# Altium PCB MainBoardSTM32.PcbDoc
Units mil, origin at the board's own origin, x right, y up, seen from the top; angles counter-clockwise.
Board outline 7675 x 6350 mil, 2 copper layers (Top Layer, Bottom Layer); 30 components, 43 nets, 161 pads, 14 vias.
Unrouted connection lines stored in the file: 50.
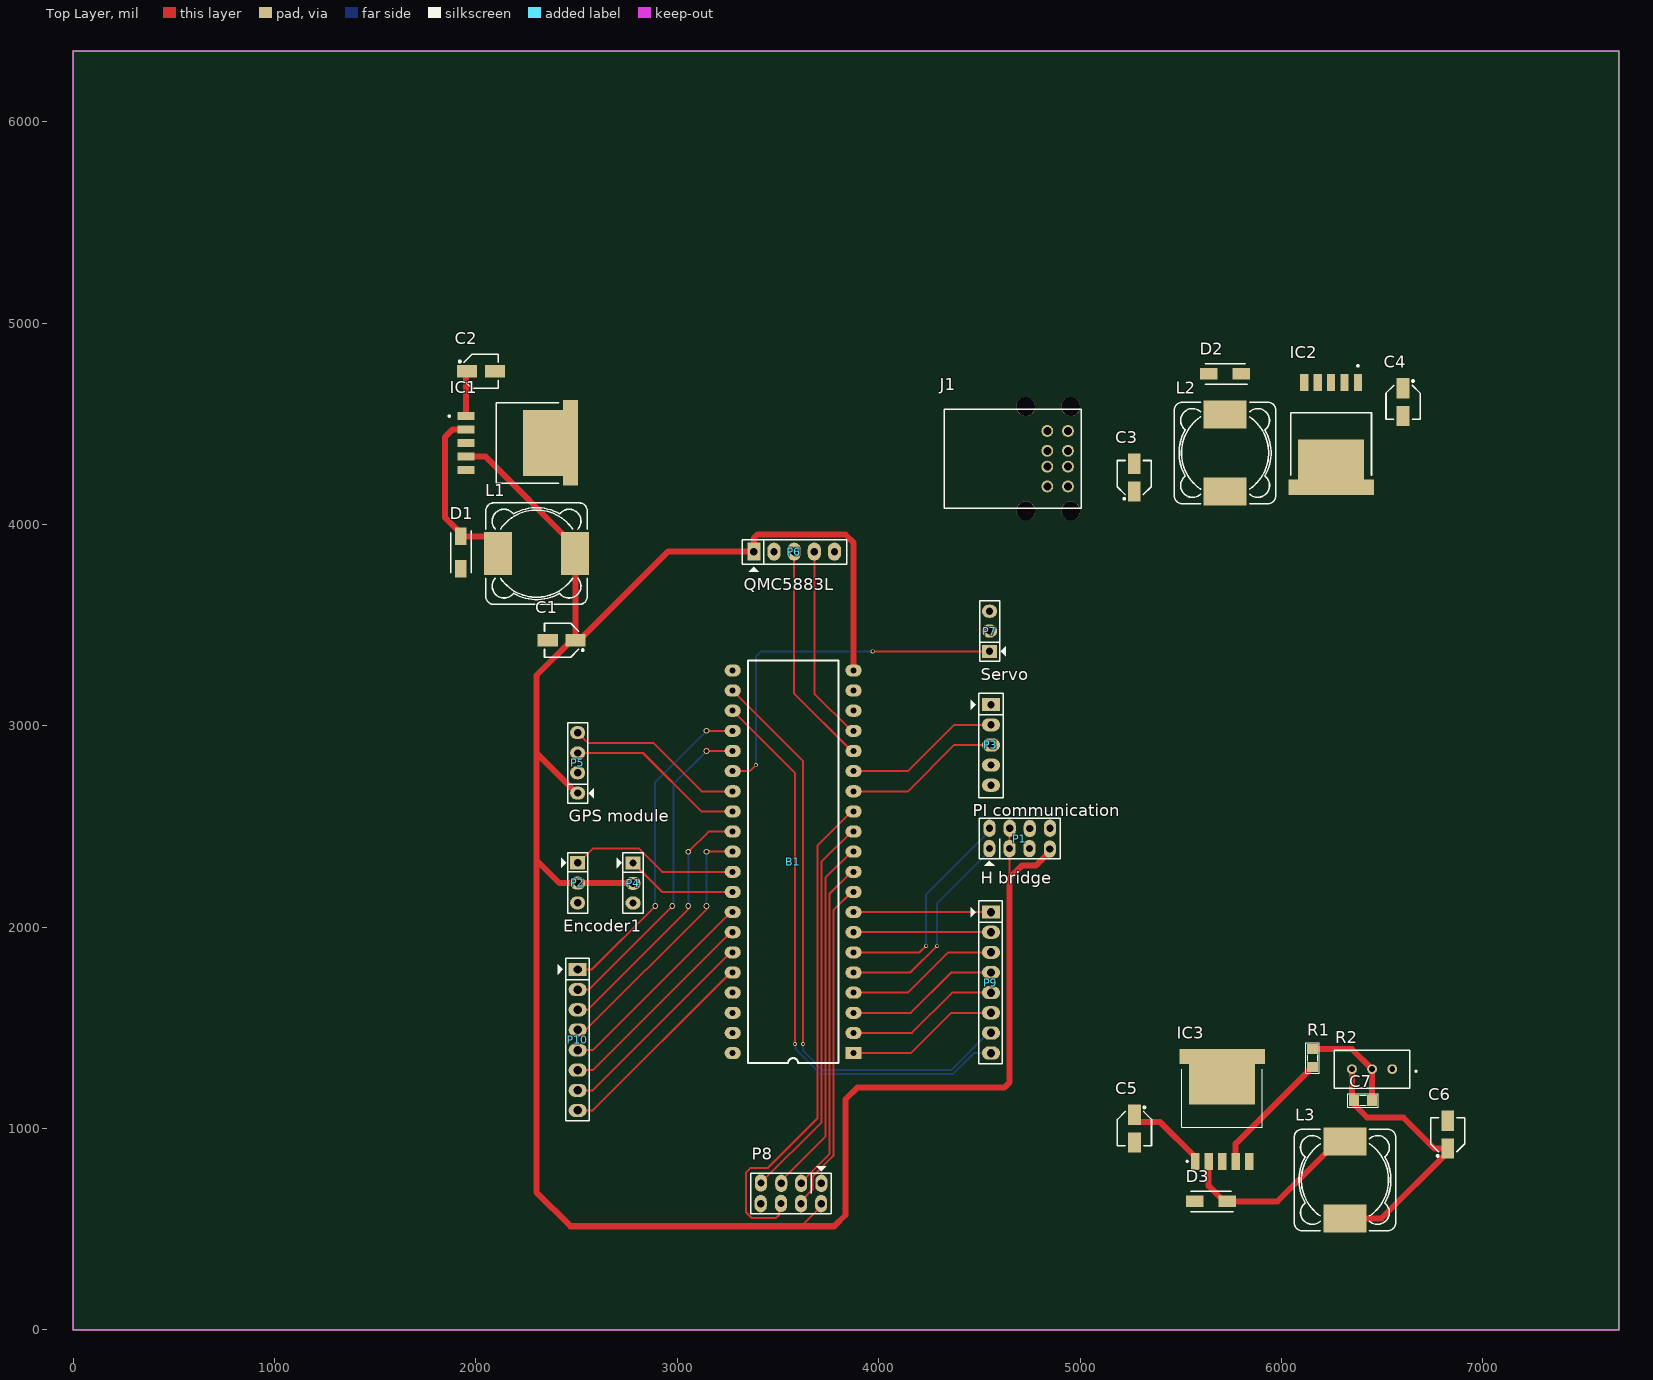
[diagram p0: Top Layer view]
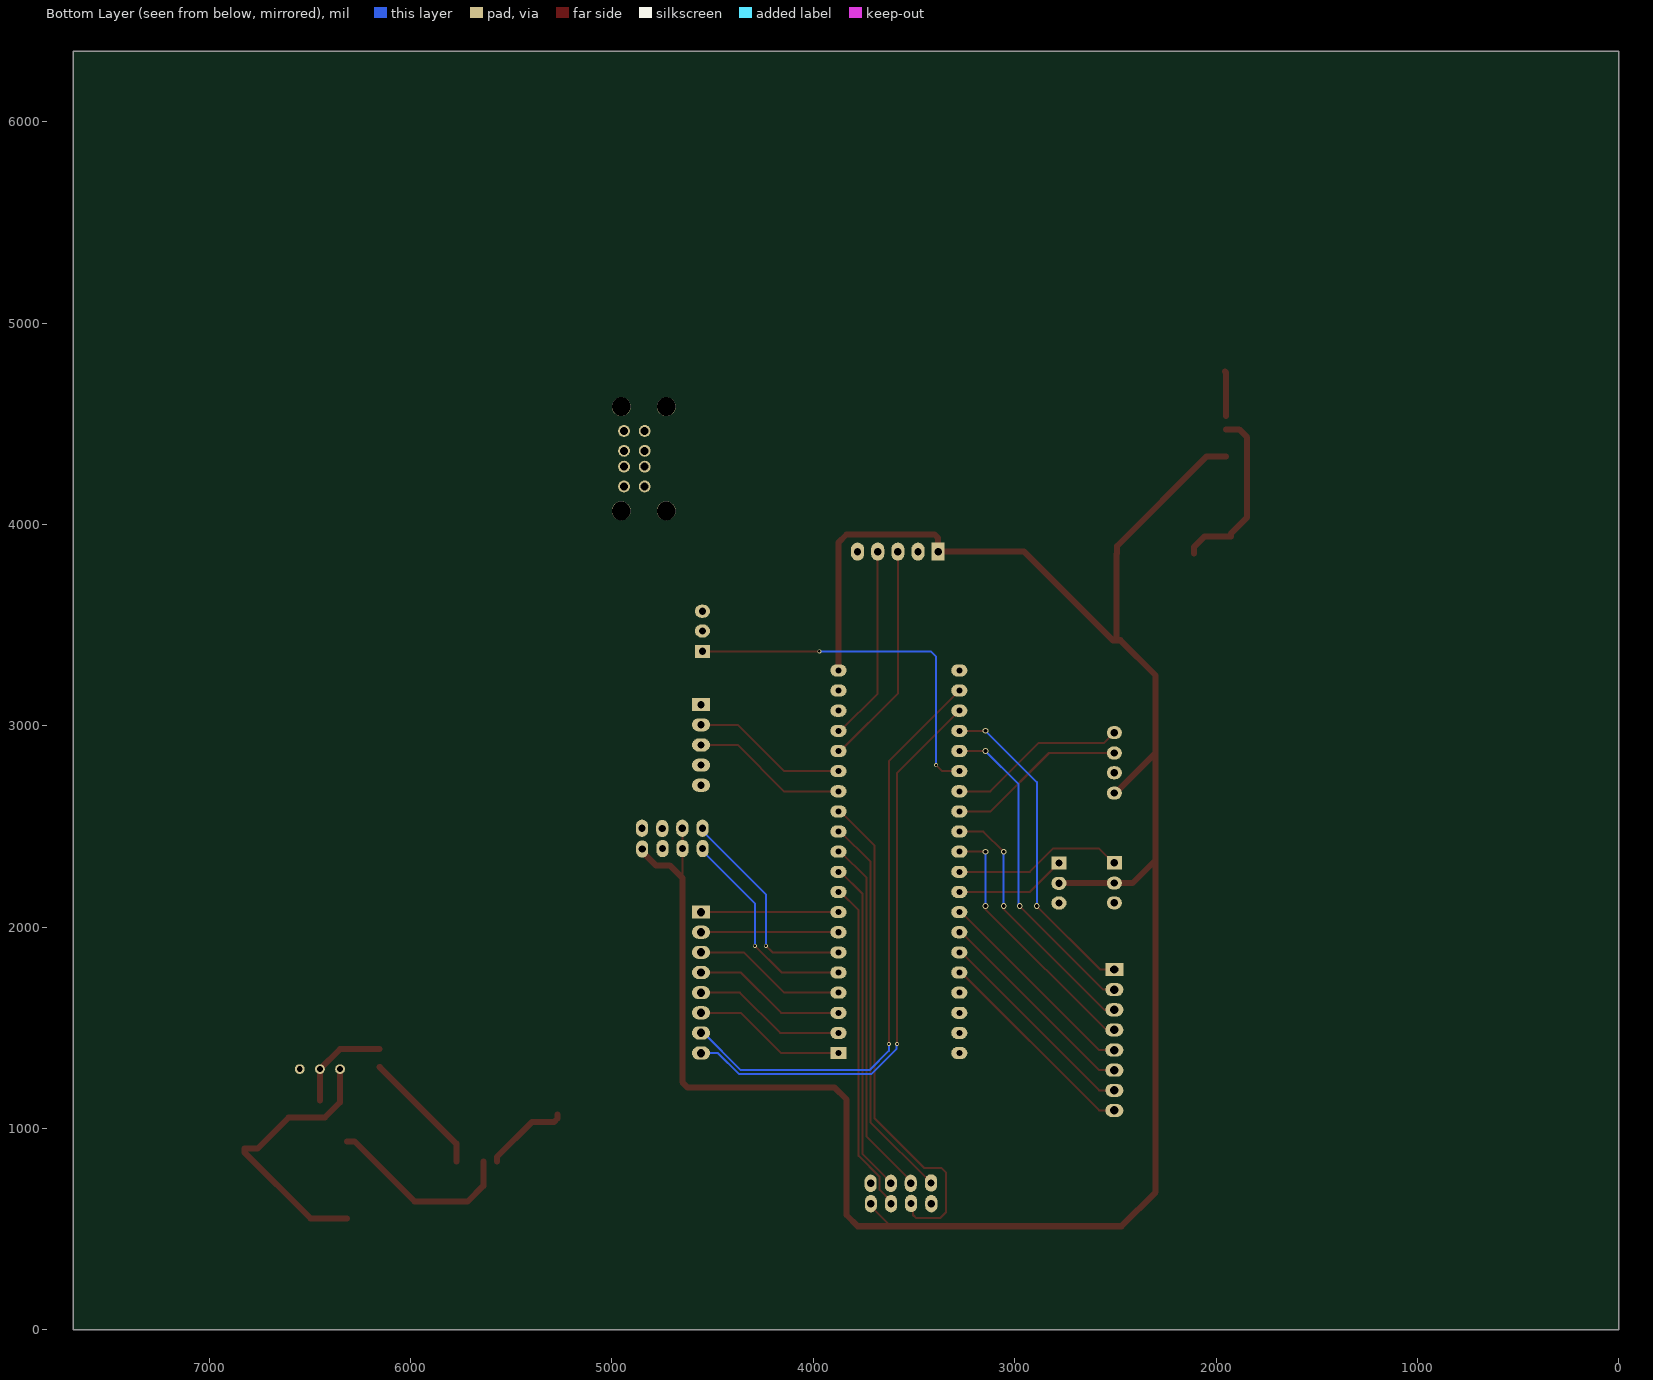
[diagram p1: Bottom Layer view, seen from below]
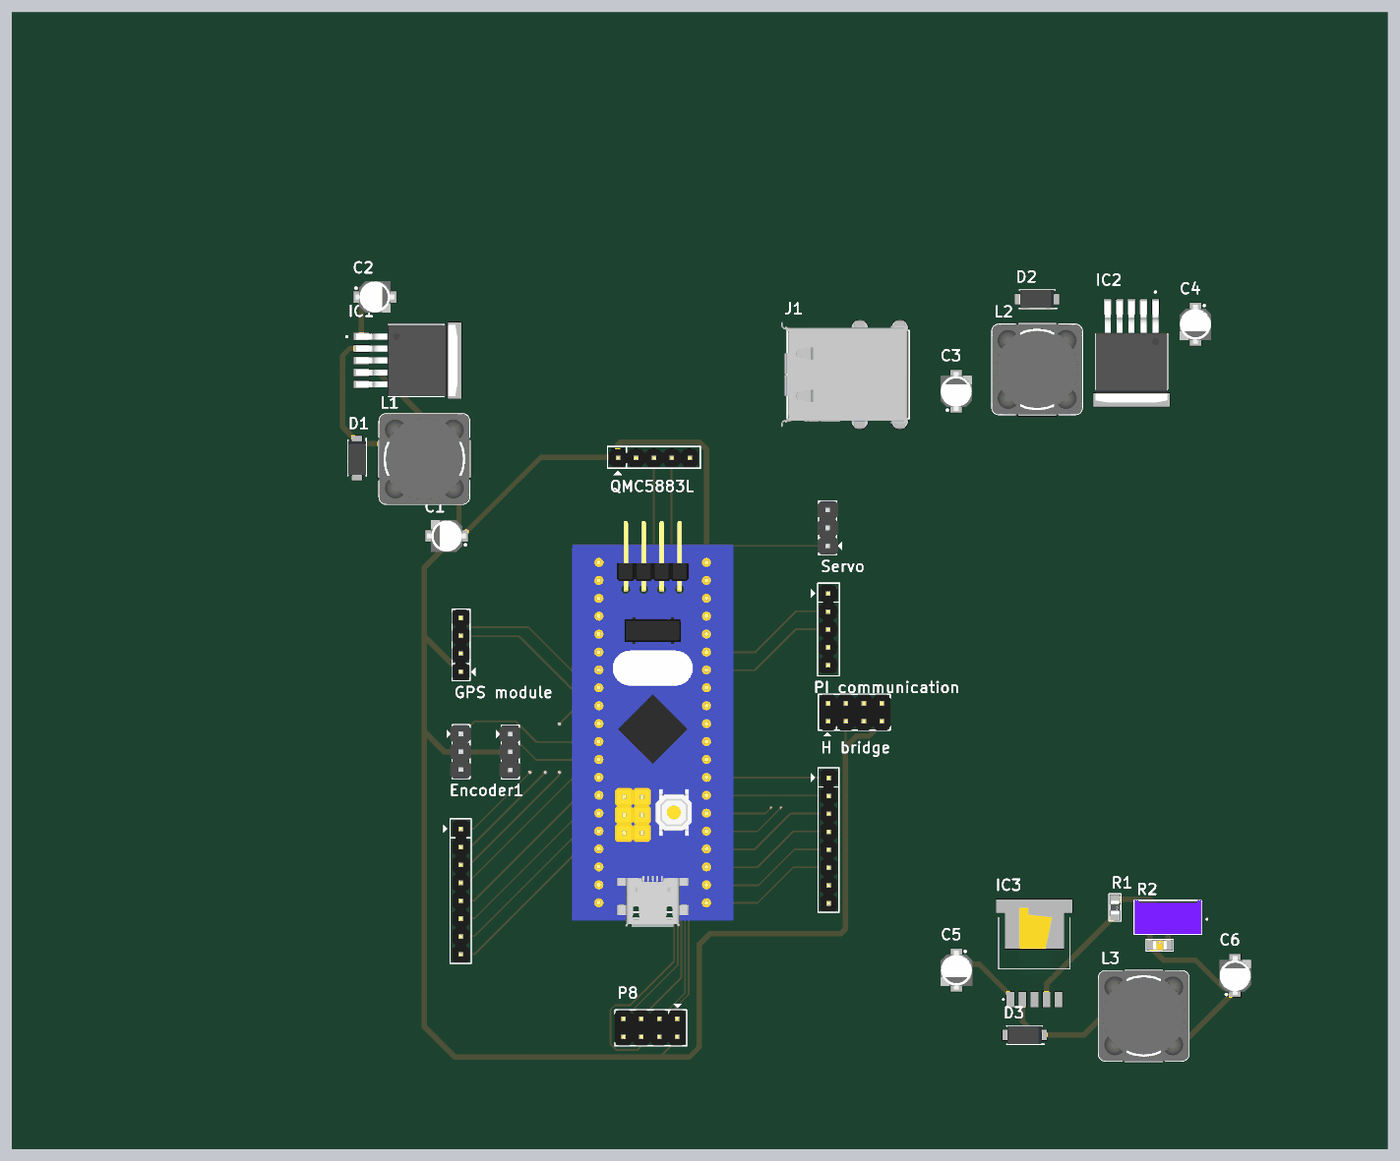
[diagram p2: 3D render of the assembled board from above, using the file's embedded part models]

## Layer stack, top to bottom
Top Solder: solder mask 0.4, Solder Resist, Dk 3.5
Top Layer: signal copper 1.4
Dielectric 1: dielectric 12.6, FR-4, Dk 4.8
Bottom Layer: signal copper 1.4
Bottom Solder: solder mask 0.4, Solder Resist, Dk 3.5

## Board outline
0,0 0,6350 7675,6350 7675,0

## Design rules (kind name [scope] priority, off if disabled: settings)
Clearance [All] p1: gap=10 ignorepadtopadclearanceinfootprint=FALSE except(0: Arc-Hole Track-Hole SMDPad-Hole THPad-Hole Via-Hole Fill-Hole Poly-Hole Region-Hole Text-Hole)
PolygonConnect [All] p1: connectstyle=Relief reliefconductorwidth=10 reliefentries=4 polygonreliefangle="90 Angle" airgapwidth=10
RoutingVias [All] p1: holewidth=18 width=30 viastyle="Through Hole" minholewidth=12 minwidth=20 maxholewidth=25 maxwidth=28
SolderMaskExpansion [All] p1: expansion=4
Width [All] p1: maxlimit=50 minlimit=10 preferedwidth=30 minimp=50.000000 maximp=50.000000 favimp=50.000000
30 further rules are at their usual default settings.

## Components (designator, comment, footprint, x,y, rotation, side; value= is the part's Value field where it differs from the comment)
B1 "Bluepill" Bluepill 3875,1375 r180 top
C1 "Cap Pol SMD" "CAP ALU SIZE B" 2425,3425 r180 top value=220uF
C2 "Cap Pol SMD" "CAP ALU SIZE B" 2025,4760 r0 top value=680uF
C3 "Cap Pol SMD" "CAP ALU SIZE B" 5268.5,4232.95 r90 top value=220uF
C4 "Cap Pol SMD" "CAP ALU SIZE B" 6603.5,4607.05 r270 top value=680uF
C5 "Cin" "CAP ALU SIZE B" 5270,1000 r270 top value=470uF
C6 "Cout" "CAP ALU SIZE B" 6825,970 r90 top value=220uF
C7 "CFF" CAP-SM-0805 6360,1140 r0 top value=680uF
D1 "SS54" DIOM5026X262N 1925,3860 r270 top
D2 "SS54" DIOM5026X262N 5720,4747.52 r180 top
D3 "SS54" DIOM5026X262N 5650,637.95 r180 top
IC1 "LM2596SX-3.3_NOPB" KTT0005B 2440.59,4405 r180 top
IC2 "LM2596S-5.0_NOPB" KTT0005B 6246.93,4214.41 r90 top
IC3 "LM2596S-ADJ_NOPB" LM2596SXADJ 5705,1095 r270 top
J1 "Pi's power" MOLEX-DUALUSB 4837.09,4326.34 r270 top
L1 "Inductor" "INDUCTOR 12.5x12.5" 2300.91,3855 r180 top value=33uH
L2 "Inductor" "INDUCTOR 12.5x12.5" 5720,4355 r90 top value=33uH
L3 "Inductor" "INDUCTOR 12.5x12.5" 6315,745 r90 top value=33uH
P1 "H bridge" JP4x2 4700,2440 r0 top
P2 "Encoder1" JP3 2505,2220 r270 top
P3 "PI communication" JP5 4557.5,3105 r270 top
P4 "Encoder2" JP3 2780,2219 r270 top
P5 "GPS module" JP4 2505,2766 r90 top
P6 "QMC5883L" JP5 3380,3865 r0 top
P7 "Servo" JP3 4550.5,3470 r90 top
P8 "NRF24L01" JP4x2 3564.5,678.5 r180 top
P9 "SPARE 2" JP8 4557.5,2075 r270 top
P10 "SPARE 1" JP8 2505,1790 r270 top
R1 "RESISTOR SMD" RES-SM-0805 6155,1395.2 r270 top value=1K
R2 "3296W-1-101LF" 3296W-1 6450,1295 r180 top

## Footprints (in the part's own frame and the unit in brackets; to place one, negate y for a bottom-side part, rotate by r counter-clockwise, add the part's x,y. Pads: shape width x height; smd on the part's side, far side on the other; paste and mask are expansions set on the pad)
3296W-1 [mm]
  round 1.24 hole 0.74: 1(-2.54,0) 2(0,0) 3(2.54,0)
  silkscreen extent -5.64,-2.41 4.76,2.41, body extent -4.78,-2.48 4.78,2.35, height 11.55
Bluepill [mil]
  rect 80x60 / inner rect 100x50 / far side rect 80x60 hole 30: 1(0,0)
  oval 80x60 / inner oval 100x50 / far side oval 80x60 hole 30: 2(0,-100) 3(0,-200) 4(0,-300) 5(0,-400) 6(0,-500) 7(0,-600) 8(0,-700) 9(0,-800) 10(0,-900) 11(0,-1000) 12(0,-1100) 13(0,-1200) 14(0,-1300) 15(0,-1400) 16(0,-1500) 17(0,-1600) 18(0,-1700) 19(0,-1800) 20(0,-1900) 21(600,-1900) 22(600,-1800) 23(600,-1700) 24(600,-1600) 25(600,-1500) 26(600,-1400) 27(600,-1300) 28(600,-1200) 29(600,-1100) 30(600,-1000) 31(600,-900) 32(600,-800) 33(600,-700) 34(600,-600) 35(600,-500) 36(600,-400) 37(600,-300) 38(600,-200) 39(600,-100) 40(600,0)
  silkscreen extent 75,-1950 525,50, body extent -1100,-2133 1000,500, height 385
"CAP ALU SIZE B" [mm] "Capacitor, Aluminium Electrolytric, 4.3mm L X 4.3mm W X 5.4mm H, IPC Medium Density"
  rect 2.55x1.6 smd: 1(-1.75,0) 2(1.75,0)
  silkscreen extent -2.8,-2.15 2.15,2.15, body extent -2.75,-2.25 2.75,2.25, height 5.7
CAP-SM-0805 [mil]
  rect 50x55 smd: 1(0,0) 2(90,0)
  silkscreen extent -32,-34 121,33, body extent 6,-25 84,25, height 31
DIOM5026X262N [mm]
  rect 2.2x1.45 smd: 1(-2.05,0) 2(2.05,0)
  silkscreen extent -2.78,-1.3 2.52,1.3, body extent -2.52,-1.3 2.52,1.3, height 2.62
"INDUCTOR 12.5x12.5" [mm] "SMD Inductor  Body Width 12.5mm Body Lenght 12.5mm Height 8mm"
  rect 3.5x5.4 smd: 1(-4.85,0) 2(4.85,0)
  silkscreen extent -6.4,-6.4 6.4,6.4, body extent -6.4,-6.4 6.4,6.4, height 8
JP3 [mil] "Jumper 3"
  rect 65x75 hole 36: 1(-100,0)
  oval 65x75 hole 36: 2(1,0) 3(99,0)
  silkscreen extent -150,-81 150,50, body extent -150,-60 150,55, height 355
JP4 [mil] "Jumper 4"
  oval 65x75 hole 36: 1(-100,0) 2(1,0) 3(99,0) 4(200,0)
  silkscreen extent -150,-81 250,50, body extent -148,-48 248,50, height 323
JP4x2 [mil] "Connector 4x2"
  oval 60x86 hole 36: 1(-150.5,-49.5) 2(-50.5,-49.5) 3(48.5,-49.5) 4(149.5,-51.5) 5(-149.5,51.5) 6(-49.5,51.5) 7(50,50) 8(150.5,51.5)
  silkscreen extent -200,-135 200,100, body extent -197,-100 203,100, height 335
JP5 [mil] "JP5"
  rect 65x90 hole 36: 1(0,0)
  oval 65x90 hole 36: 2(100,0) 3(200,0) 4(300,0) 5(400,0)
  silkscreen extent -57,-101 461,60, body extent -48,-53 448,45, height 323
JP8 [mil] "JP8"
  rect 65x90 hole 42: 1(0,0)
  oval 65x90 hole 42: 2(100,0) 3(200,0) 4(300,0) 5(400,0) 6(500,0) 7(600,0) 8(700,0)
  silkscreen extent -56,-100 752,57, body extent -48,-50 748,48, height 323
KTT0005B [mm]
  rect 2.16x1.02 smd: 1(12.461,-3.4) 2(12.461,-1.7) 3(12.461,0) 4(12.461,1.7) 5(12.461,3.4)
  rect 6.99x8.33 smd: 6(1.786,0)
  rect 1.91x1.235 smd: 7(-0.754,4.782) 8(-0.754,-4.782)
  silkscreen extent 0.76,-5.08 14.68,5.08, body extent -1.11,-5.08 13.24,5.08, height 4.72
LM2596SXADJ [mm]
  rect 2.16x1.07 smd: 1(6.545,-3.4) 2(6.545,-1.7) 3(6.545,0) 4(6.545,1.7) 5(6.545,3.4)
  rect 1.91x10.8 smd: T1(-6.67,0)
  rect 5.08x8.33 smd: T2(-3.175,0)
  silkscreen extent -5.06,-5.08 6.64,5.08, body extent -6.75,-2.3 7.65,2.5
MOLEX-DUALUSB [mm]
  round 1.5 hole 1: 1(-3.5,0) 2(-1,0) 3(1,0) 4(3.5,0) 5(-3.5,2.61) 6(-1,2.61) 7(1,2.61) 8(3.5,2.61)
  round 2.38 hole 2.38 unplated: 9(-6.57,2.96) 10(6.57,2.96) 11(6.57,-2.72) 12(-6.57,-2.72)
  silkscreen extent -6.25,-13 6.25,4.3, body extent -7.66,-13.82 7.66,4.04, height 15.78
RES-SM-0805 [mil]
  rect 50x55 smd: 1(0,0) 2(90,0)
  silkscreen extent -32,-34 121,33, body extent 6,-25 84,25, height 31

## Part data
C1 C2 C3 C4: "Polarized Capacitor (Radial)"
C5 C6: library part "Cap Pol SMD", "Polarized Capacitor (Radial)"
C7: library part "Cap Non-Pol SMD", "Capacitor"
D1 D2 D3: "Schottky Diode", Manufacturer_Name="DIYI Elec Tech", Datasheet Link=https://datasheet.lcsc.com/szlcsc/DIYI-Elec-Tech-SS54_C84165.pdf, Height=2.62mm, Manufacturer_Part_Number=SS54
IC1: "Integrated Circuit", Arrow Part Number=LM2596SX-3.3/NOPB, Manufacturer_Name="Texas Instruments", Mouser Part Number=926-LM2596SX33NOPB, Arrow Price/Stock=https://www.arrow.com/en/products/lm2596sx-3.3nopb/texas-instruments?region=nac, Datasheet Link=http://www.ti.com/lit/gpn/lm2596, Manufacturer_Part_Number=LM2596SX-3.3/NOPB, Mouser Price/Stock=https://www.mouser.co.uk/ProductDetail/Texas-Instruments/LM2596SX-33-NOPB?qs=X1J7HmVL2ZEm4UYTFC0WWA%3D%3D
IC2: "Integrated Circuit", Arrow Part Number=LM2596S-5.0/NOPB, Manufacturer_Name="Texas Instruments", Mouser Part Number=926-LM2596S-5.0/NOPB, Arrow Price/Stock=https://www.arrow.com/en/products/lm2596s-5.0nopb/texas-instruments?region=nac, Datasheet Link=https://www.ti.com/lit/gpn/LM2596, Manufacturer_Part_Number=LM2596S-5.0/NOPB, Mouser Price/Stock=https://www.mouser.co.uk/ProductDetail/Texas-Instruments/LM2596S-50-NOPB?qs=X1J7HmVL2ZHVjCOmW%252BYINA%3D%3D
IC3: "Integrated Circuit", Arrow Part Number=LM2596S-ADJ/NOPB, Manufacturer_Name="Texas Instruments", Mouser Part Number=926-LM2596S-ADJ/NOPB, Arrow Price/Stock=https://www.arrow.com/en/products/lm2596s-adjnopb/texas-instruments?region=nac, Datasheet Link=https://www.ti.com/lit/ds/symlink/lm2596.pdf?HQS=ti-null-null-sf-df-pf-sep-wwe&ts=1592978195629, Height=4.57mm, Manufacturer_Part_Number=LM2596S-ADJ/NOPB, Mouser Price/Stock=https://www.mouser.co.uk/ProductDetail/Texas-Instruments/LM2596S-ADJ-NOPB?qs=X1J7HmVL2ZHoMN0DLDcNog%3D%3D
J1: library part 67298-3090, "Connector", Manufacturer_Name=Molex, Mouser Part Number=538-67298-3090, Datasheet Link=https://datasheet.datasheetarchive.com/originals/distributors/Datasheets_SAMA/769e69235f305794a0165724e99951b5.pdf, Manufacturer_Part_Number=67298-3090, Mouser Price/Stock=https://www.mouser.co.uk/ProductDetail/Molex/67298-3090?qs=x6EjVpvqMVOYHaae5plDDQ%3D%3D
P1 P8: library part "Header 4X2", "Header, 4-Pin, Dual row", LatestRevisionDate=17-Jul-2002, LatestRevisionNote="Re-released for DXP Platform.", Publisher="Altium Limited"
P2 P4 P7: library part "Header 3", "Header, 3-Pin", LatestRevisionDate=17-Jul-2002, LatestRevisionNote="Re-released for DXP Platform.", Publisher="Altium Limited"
P3 P6: library part "Header 5", "Header, 5-Pin", LatestRevisionDate=17-Jul-2002, LatestRevisionNote="Re-released for DXP Platform.", Publisher="Altium Limited"
P5: library part "Header 4", "Header, 4-Pin", LatestRevisionDate=17-Jul-2002, LatestRevisionNote="Re-released for DXP Platform.", Publisher="Altium Limited"
P9 P10: library part "Header 8", "Header, 8-Pin", LatestRevisionDate=17-Jul-2002, LatestRevisionNote="Re-released for DXP Platform.", Publisher="Altium Limited"
R1: "Resistor"
R2: "Resistor", Manufacturer_Name=Bourns, Mouser Part Number=652-3296W-1-101LF, Arrow Part Number=3296W-1-101LF, Arrow Price/Stock=https://www.arrow.com/en/products/3296w-1-101lf/bourns?region=nac, Datasheet Link=https://www.bourns.com/pdfs/3296.pdf, Manufacturer_Part_Number=3296W-1-101LF, Mouser Price/Stock=https://www.mouser.co.uk/ProductDetail/Bourns/3296W-1-101LF?qs=UcU9LKO1dwEefwKxVJG4Jw%3D%3D

## Via types
v1: diameter 28, hole 18, Top Layer to Bottom Layer, tented both sides, 8 vias
v2: diameter 20, hole 12, Top Layer to Bottom Layer, tented both sides, 6 vias

## Nets (pads, with @x,y where several pads share a name; then routed paths per layer and width w, separated by ;. In a path a pad name is that pad's centre, name@x,y a point inside that pad or via, vN(x,y) a via of type N, cw(c..) or ccw(c..) an arc to the next point about the centre after c; other vN are vias at no path point)
12V: C2.1 C4.1 C5.1 IC1.1 IC2.1 IC3.1 | length 644.3
  Top Layer w30: IC1.1 1950,4753.9 C2.1 ; C5.1 5270,1050.2 5286.5,1033.7 5396.22,1033.7 5571.14,858.78 IC3.1
Encoder1: B1.31 P2.1 | length 846.6
  Top Layer w10: P2.1 2510,2320 2580,2390 2810,2390 2925,2275 B1.31
Encoder2: B1.32 P4.1 | length 554.6
  Top Layer w10: P4.1 2924,2175 B1.32
FB6V: IC3.4 R1.2 | length 628
  Top Layer w30: IC3.4 5772.15,837.54 5772.15,924.84 6152.5,1305.2 R1.2
GND: B1.19 B1.39 B1.40 C1.2 C2.2 C3.2 C4.2 C5.2 C6.2 D1.2 D2.2 D3.2 IC1.3 IC1.5 IC1.6 IC2.3 IC2.5 IC2.6 IC3.3 IC3.5 IC3.T1 IC3.T2 J1.4 J1.8 P1.3 P1.7 P1.8 P2.3 P3.4 P4.3 P5.2 P6.2 P7.3 P8.1 R2.1
I2C1_SCL: B1.16 P6.3 | length 1118.1
  Top Layer w10: P6.3 3580,3160 3865,2875 B1.16
I2C1_SDA: B1.17 P6.4 | length 976.6
  Top Layer w10: P6.4 3680,3160 3865,2975 B1.17
LPWM: B1.6 P1.5 | length 1088.9
  Top Layer w10: B1.6@3875.5,1875.5 B1.6 4202.5,1875 v2(4235,1907.5)
  Bottom Layer w10: v2(4235,1907.5) 4235,2163 4550.5,2478.5 P1.5
MCU_RX-GPS_TX: B1.28 P5.3 | length 890.1
  Top Layer w10: P5.3 2829.5,2865 3119.5,2575 B1.28
MCU_RX-PI_TX: B1.15 P3.2 | length 777.8
  Top Layer w10: B1.15 4145,2775 4375,3005 P3.2
MCU_TX-GPS_RX: B1.27 P5.4 | length 890.5
  Top Layer w10: P5.4 2556,2915 2881,2915 3121,2675 B1.27
MCU_TX-PI_RX: B1.14 P3.3 | length 777.8
  Top Layer w10: B1.14 4146,2675 4376,2905 P3.3
NetC7_2: C7.2 R1.1 R2.2 | length 491.5
  Top Layer w30: R1.1 6349.8,1395.2 R2.2 C7.2
OUTPUT3V3: D1.1 IC1.2 L1.2 | length 884.6
  Top Layer w30: IC1.2 1885,4471.93 1845.47,4432.4 1845.47,4035 1925,3955.47 D1.1 2056.06,3940.71 2109.96,3886.81 L1.2
OUTPUT5V: D2.1 IC2.2 L2.2
OUTPUT6V: D3.1 IC3.2 L3.2 | length 954.1
  Top Layer w30: IC3.2 5638.07,715.83 5715.94,637.95 D3.1 5979.61,637.95 6277.6,935.94 L3.2
PA0: B1.25 P10.2 | length 1612.3
  Top Layer w10: P10.2 2560,1690 v1(2975,2105) ; v1(3145,2875) B1.25
  Bottom Layer w10: v1(2975,2105) 2980,2110 2980,2710 v1(3145,2875)
PA4: B1.29 P10.3 | length 1303.5
  Top Layer w10: P10.3 2555,1590 3055,2090 v1(3055,2105) ; v1(3055,2375) 3155,2475 B1.29
  Bottom Layer w10: v1(3055,2105) v1(3055,2375)
PA5: B1.30 P10.4 | length 1303.5
  Top Layer w10: P10.4 2545,1490 3145,2090 v1(3145,2105) ; v1(3145,2375) B1.30
  Bottom Layer w10: v1(3145,2105) v1(3145,2375)
PA10: B1.7 P9.2 | length 682.5
  Top Layer w10: B1.7 P9.2
PA11: B1.8 P9.1 | length 682.5
  Top Layer w10: B1.8 P9.1
PB0: B1.33 P10.5 | length 1053.7
  Top Layer w10: P10.5 2580,1390 3265,2075 B1.33
PB1: B1.34 P10.6 | length 1053.7
  Top Layer w10: P10.6 2580,1290 3265,1975 B1.34
PB10: B1.35 P10.7 | length 1053.7
  Top Layer w10: P10.7 2580,1190 3265,1875 B1.35
PB11: B1.36 P10.8 | length 1053.7
  Top Layer w10: P10.8 2580,1090 3265,1775 B1.36
PB12: B1.1 P9.6 | length 765.3
  Top Layer w10: B1.1 4160,1375 4360,1575 P9.6
PB13: B1.2 P9.5 | length 765.3
  Top Layer w10: B1.2 4165,1475 4365,1675 P9.5
PB14: B1.3 P9.4 | length 765.3
  Top Layer w10: B1.3 4160,1575 4360,1775 P9.4
PB15: B1.4 P9.3 | length 765.3
  Top Layer w10: B1.4 4145,1675 4345,1875 P9.3
PC13: B1.22 P9.7 | length 2983
  Top Layer w10: B1.22 3625,2825 v2(3625,1420)
  Bottom Layer w10: v2(3625,1420) 3625,1385.86 3720.86,1290 4360,1290 4545,1475 P9.7
PC14: B1.23 P9.8 | length 2874.7
  Top Layer w10: B1.23 3584,2766 v2(3584,1420)
  Bottom Layer w10: v2(3584,1420) 3585.91,1418.09 3585.91,1396.66 3712.57,1270 4368.28,1270 4473.28,1375 P9.8
PC15: B1.24 P10.1 | length 1621.1
  Top Layer w10: P10.1 2575,1790 v1(2890,2105) ; v1(3145,2975) B1.24
  Bottom Layer w10: v1(2890,2105) 2890,2720 v1(3145,2975)
RPWM: B1.5 P1.1 | length 1060.4
  Top Layer w10: B1.5 4157.5,1775 v2(4290,1907.5)
  Bottom Layer w10: v2(4290,1907.5) 4290,2118 4549.5,2377.5 P1.1
ServoPWM: B1.26 P7.1 | length 1836.8
  Top Layer w10: B1.26 3360,2775 v2(3390,2805) ; v2(3970,3370) P7.1
  Bottom Layer w10: v2(3390,2805) 3390,3342.5 3417.5,3370 v2(3970,3370)
SPI1_CE: B1.10 P8.2 | length 1660.6
  Top Layer w10: P8.2 3615,732.92 3755,872.92 3755,2165 3865,2275 B1.10
SPI1_CSN: B1.9 P8.6 | length 1662
  Top Layer w10: P8.6 3614,640 3670,696 3670,759.64 3775,864.64 3775,2085 3865,2175 B1.9
SPI1_MISO: B1.12 P8.4 | length 1941.4
  Top Layer w10: P8.4 3715,1030 3715,2325 3865,2475 B1.12
SPI1_MOSI: B1.13 P8.7 | length 2512.4
  Top Layer w10: P8.7 3504.93,618.93 3504.93,570.79 3489.14,555 3370.79,555 3340,585.79 3340,780 3365,805 3450,805 3695,1050 3695,2405 3865,2575 B1.13
SPI1_SCK: B1.11 P8.3 | length 1801.6
  Top Layer w10: P8.3 3516,741 3735,960 3735,2245 3865,2375 B1.11
UU: J1.2 J1.3 J1.6 J1.7 J1.9 J1.10 J1.11 J1.12
VCC3V3: B1.20 C1.1 IC1.4 L1.1 P1.2 P1.4 P1.6 P2.2 P4.2 P5.1 P6.1 P8.5 | length 11865.3
  Top Layer w10: 3615,515 3714,614 P8.5 ; 4650.5,2245 4650.5,2389.5 P1.2 4650,2391 4650,2491 P1.6
  Top Layer w30: IC1.4 2046.18,4338.07 2491.85,3892.4 L1.1 2493.9,3852.95 C1.1 ; P5.1 2500,2666 2300.2,2865.8 ; P4.2 2779.5,2218.5 2505.5,2218.5 P2.2 2415,2219 2300.2,2333.8 ; B1.20 3875,3910 3835,3950 3397.57,3950 3380,3932.43 P6.1 2952.6,3865 2512.6,3425 C1.1 ; P1.4 4849.5,2375.5 4781.38,2307.38 4712.88,2307.38 4650.5,2245 4650.5,1230.5 4625,1205 3895,1205 3835,1145 3835,570.79 3779.21,515 3615,515 2470,515 2300.2,684.8 2300.2,2333.8 ; 2300.2,2333.8 2300.2,2865.8 ; 2300.2,2865.8 2300.2,3250 2475.2,3425 C1.1
VCC5V: C3.1 IC2.4 J1.1 J1.5 L2.1
VCC6V: C6.1 C7.1 L3.1 P7.2 R2.3 | length 1399.5
  Top Layer w30: L3.1 6496.65,554.06 6825,882.4 C6.1 6758.9,901.1 6605,1055 6425,1055 6350,1130 R2.3
pads on no net: B1.18 B1.21 B1.37 B1.38 IC1.7 IC1.8 IC2.7 IC2.8 P3.1 P3.5 P6.5 P8.8

## Keep-outs
Top Layer:
  lines w10: 0,0 7675,0 7675,6155 7675,6350 0,6350 0,6160 0,0